# Altium PCB cybathlon_core.PcbDoc
Units mm, origin at the board's own origin, x right, y up, seen from the top; angles counter-clockwise.
Board outline 30 x 40 mm, 4 copper layers (Top Layer, gnd, sig, Bottom Layer), stack 0.603 mm thick; 63 components, 53 nets, 264 pads, 142 vias.
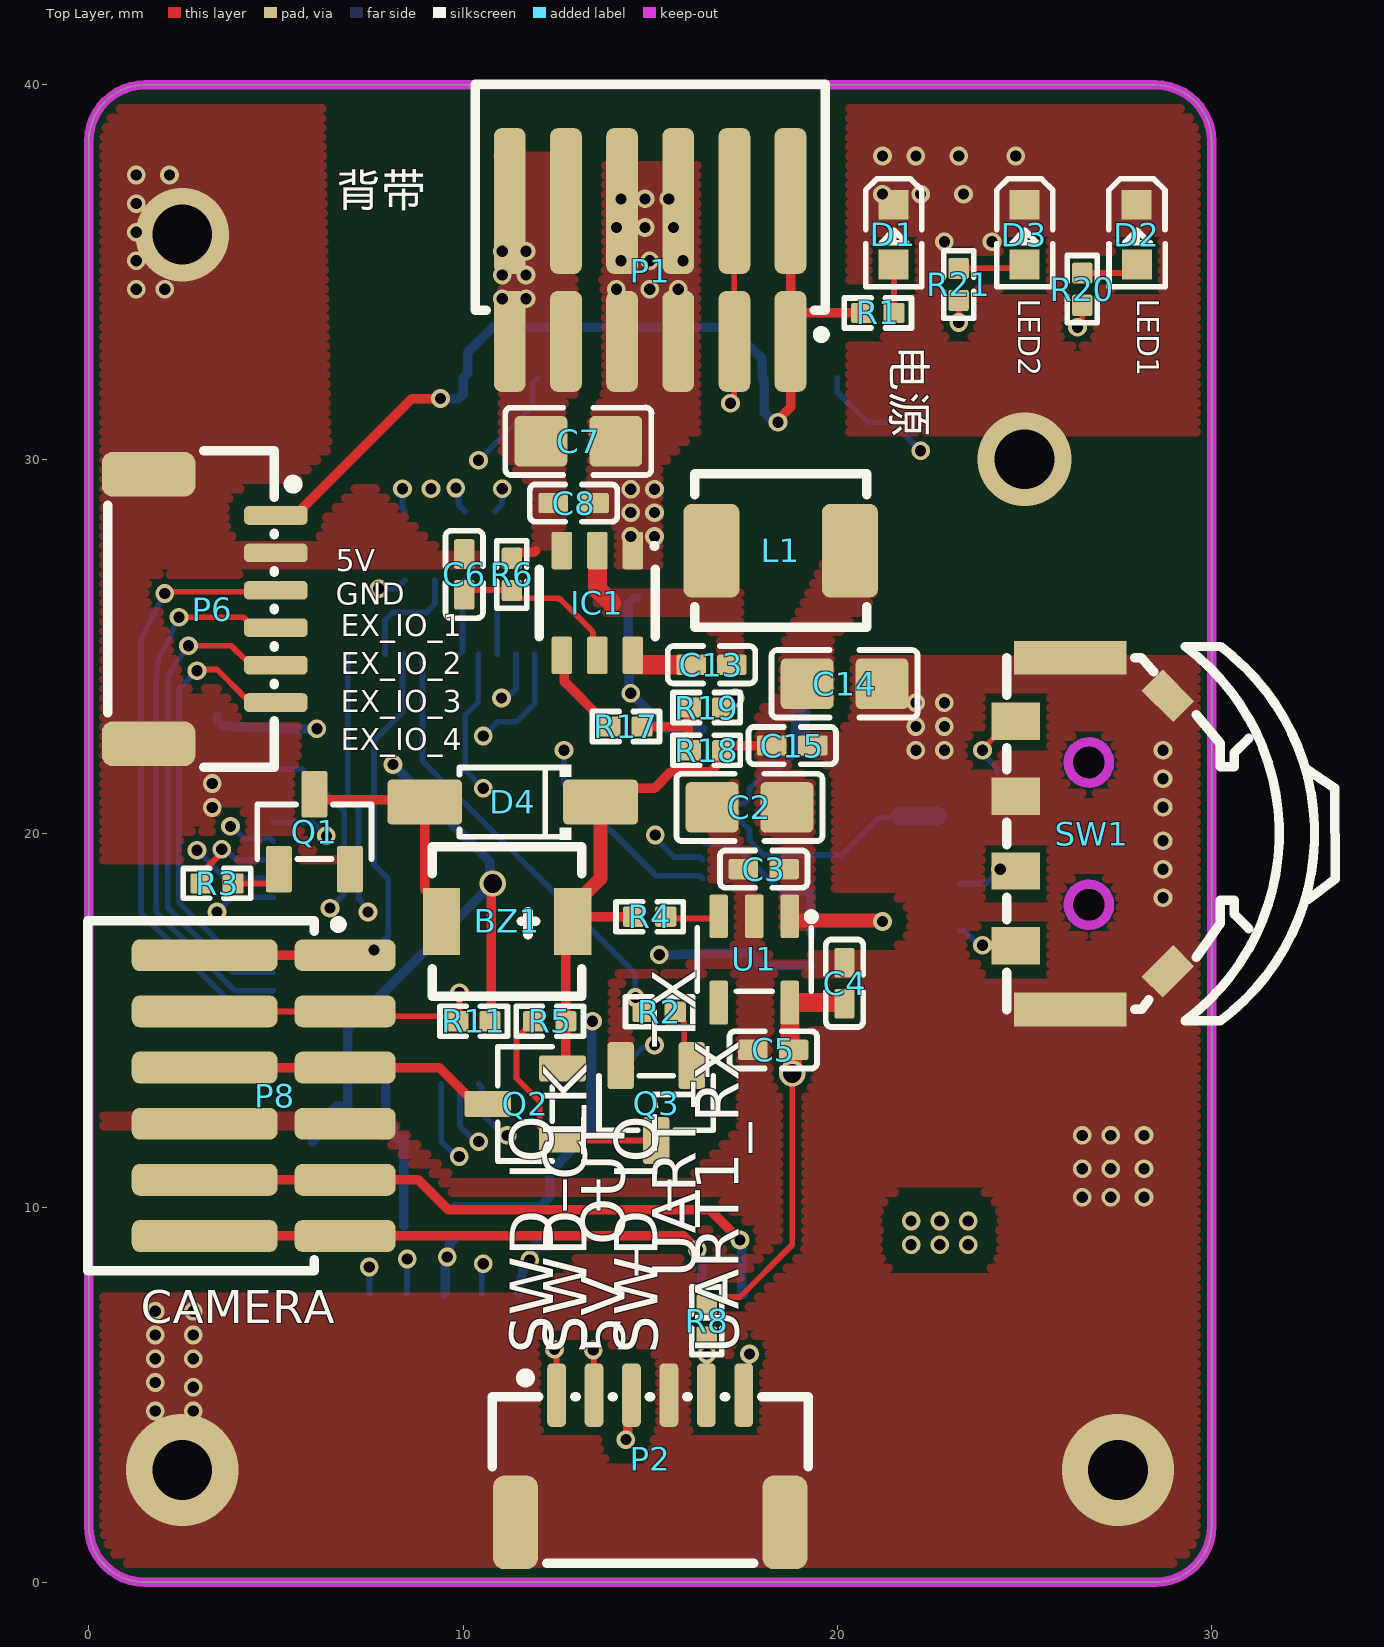
[diagram p0: Top Layer view]
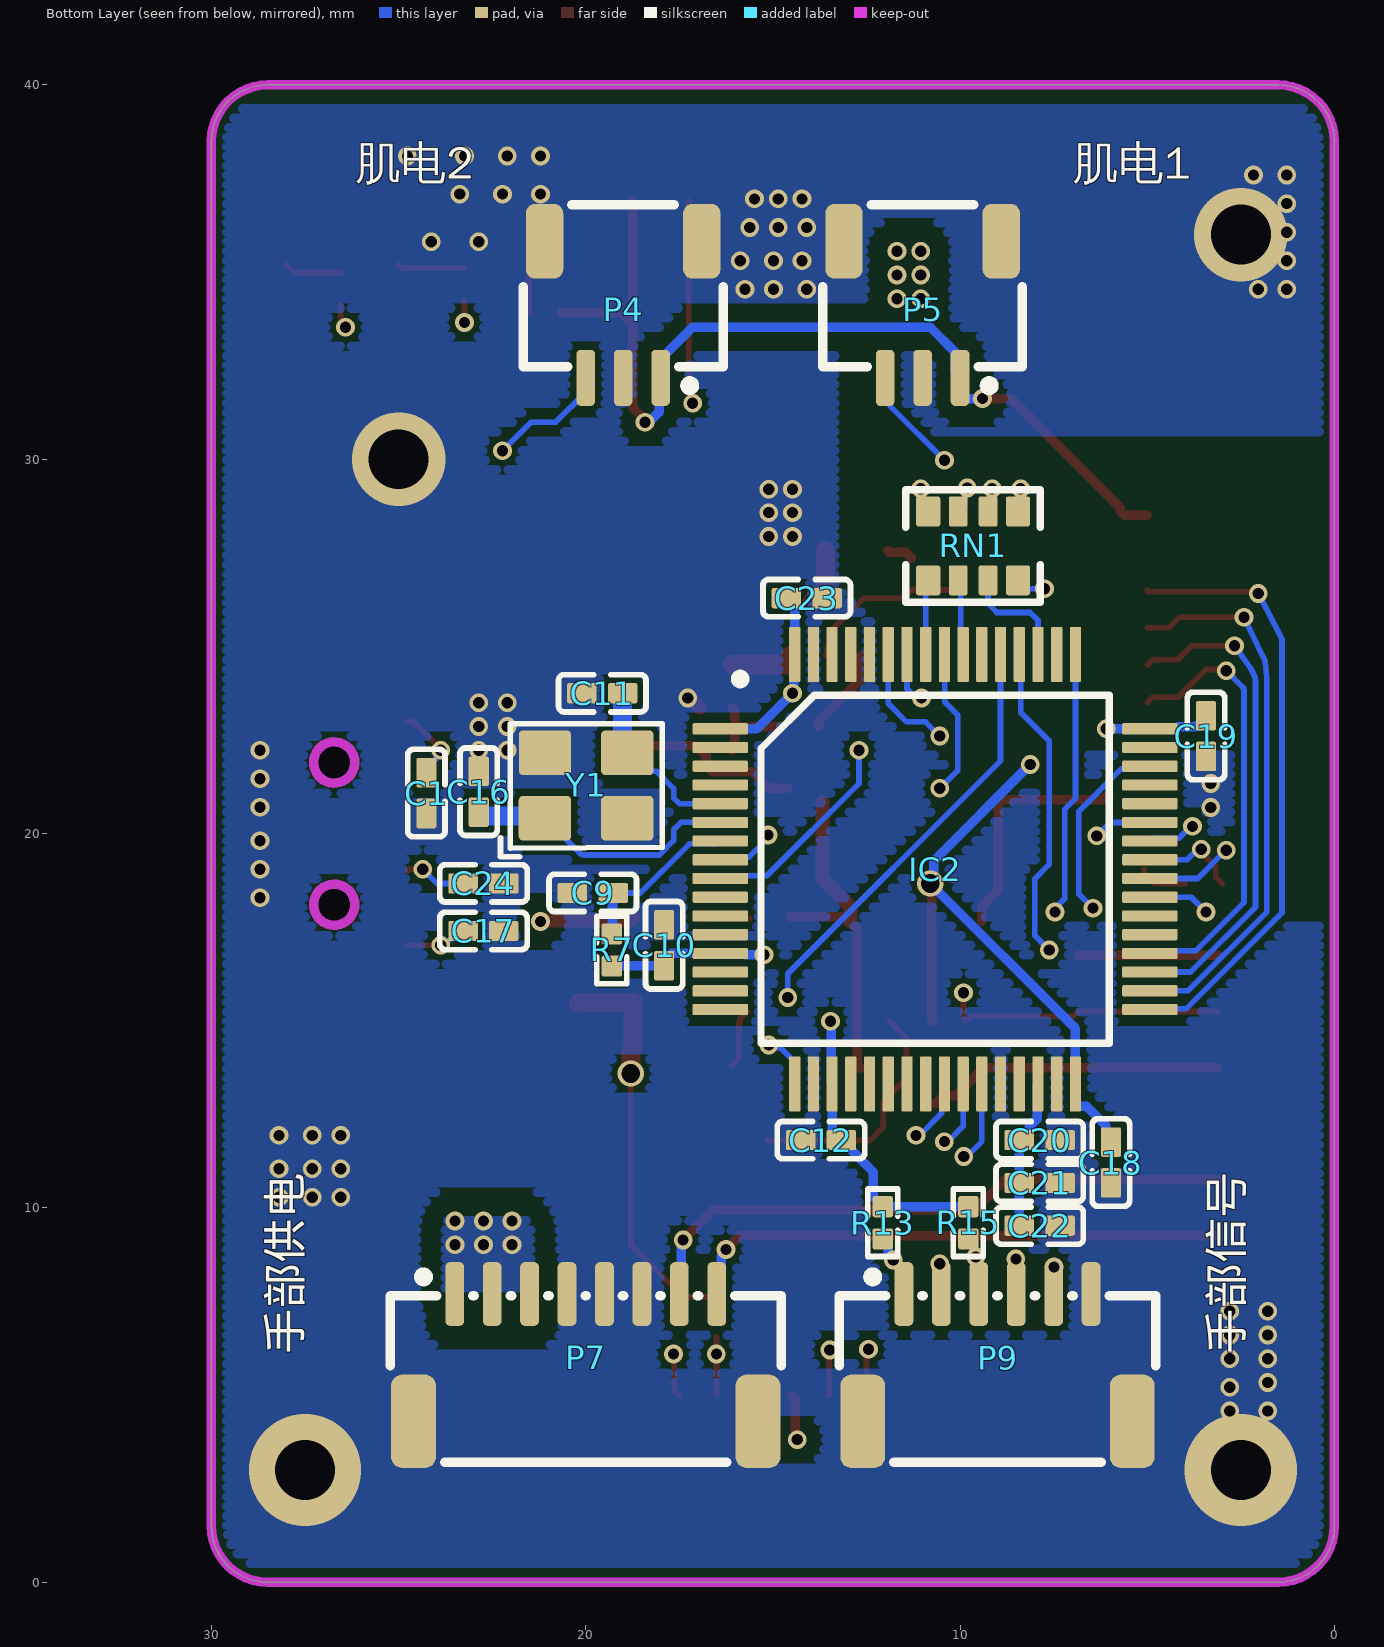
[diagram p1: Bottom Layer view, seen from below]
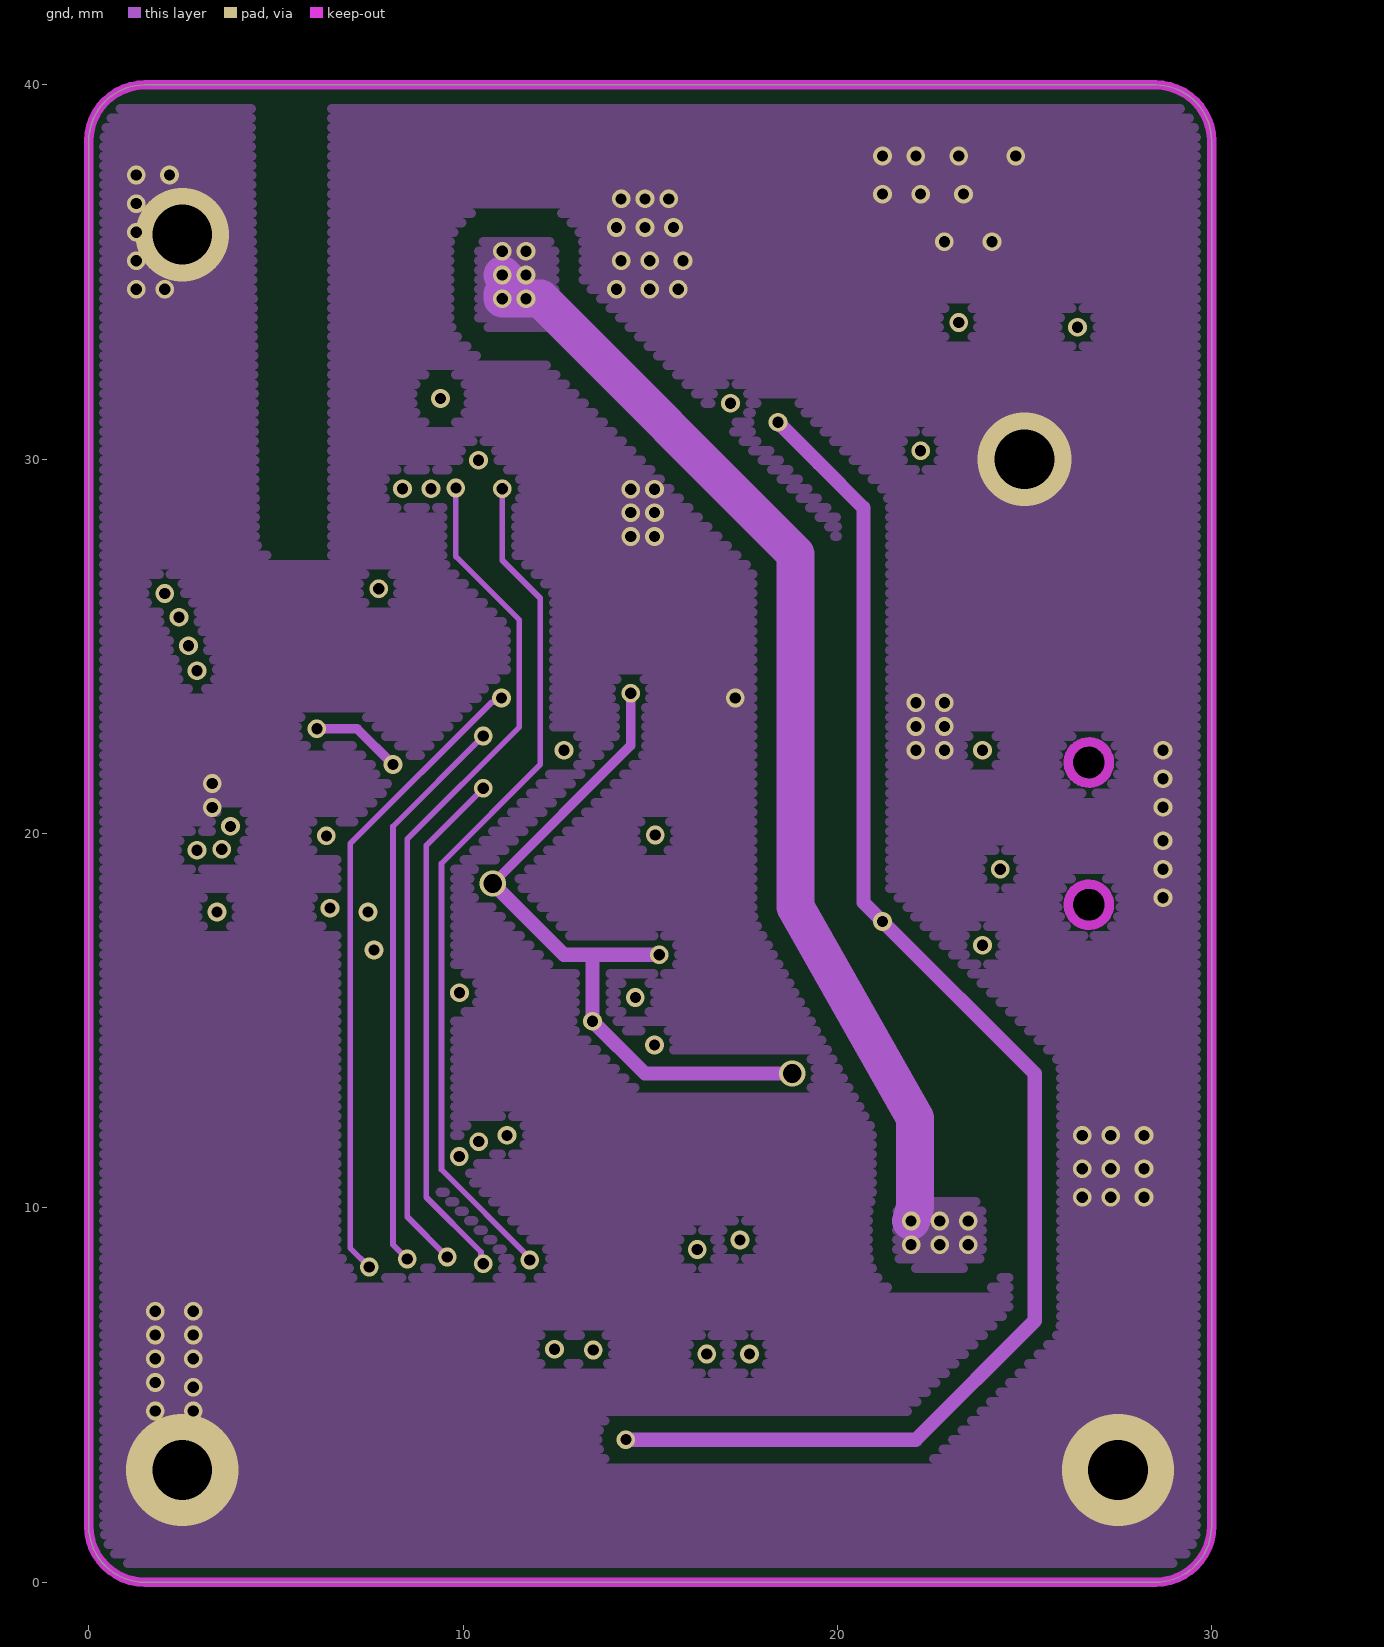
[diagram p2: gnd]
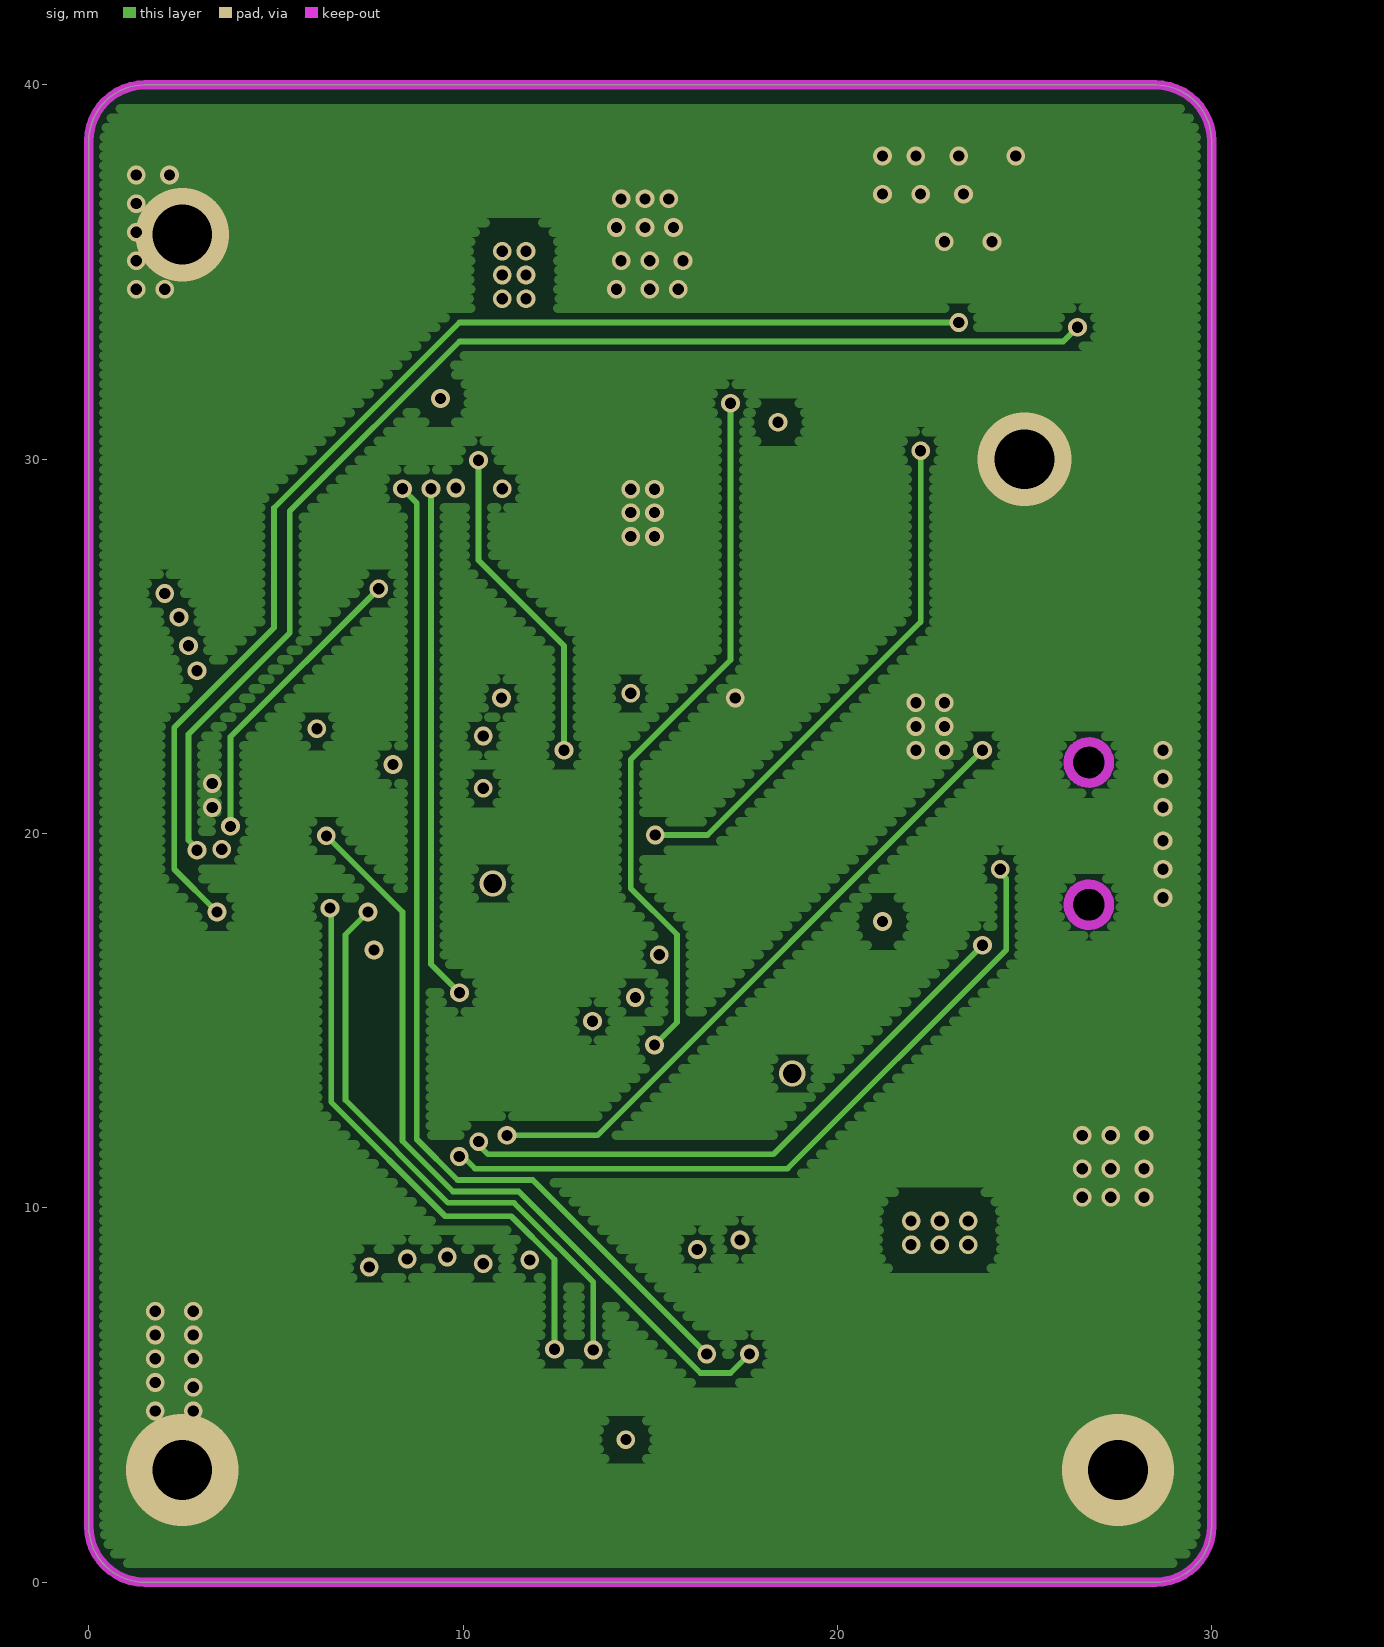
[diagram p3: sig]
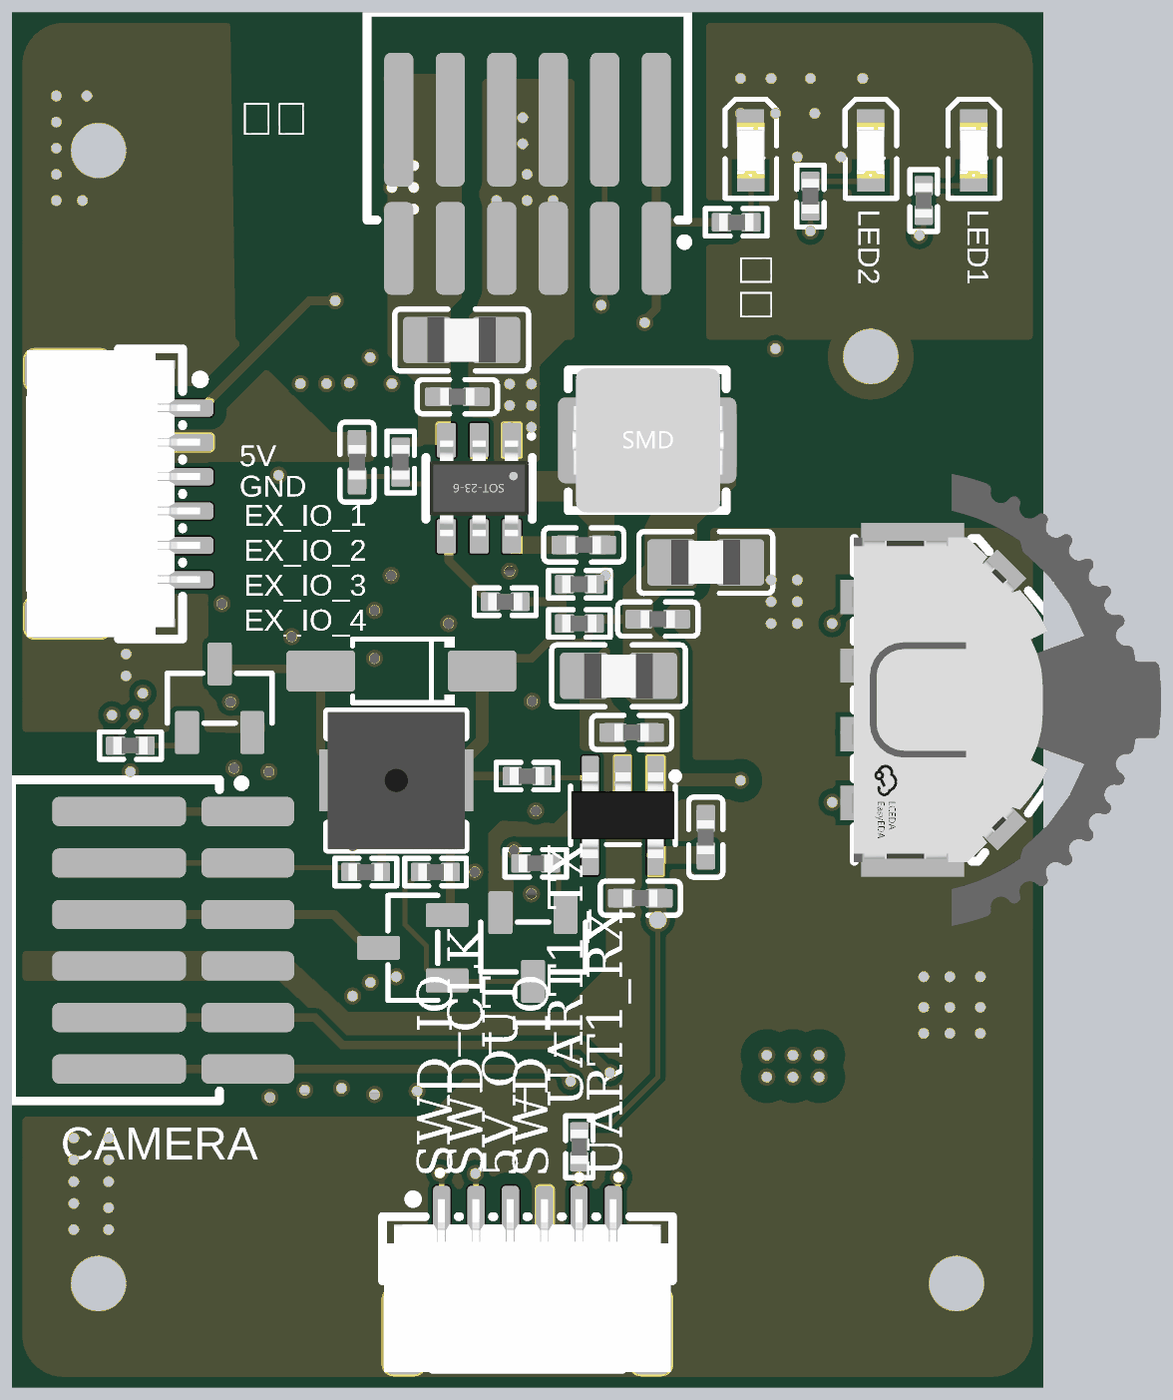
[diagram p4: 3D render of the assembled board from above, using the file's embedded part models]
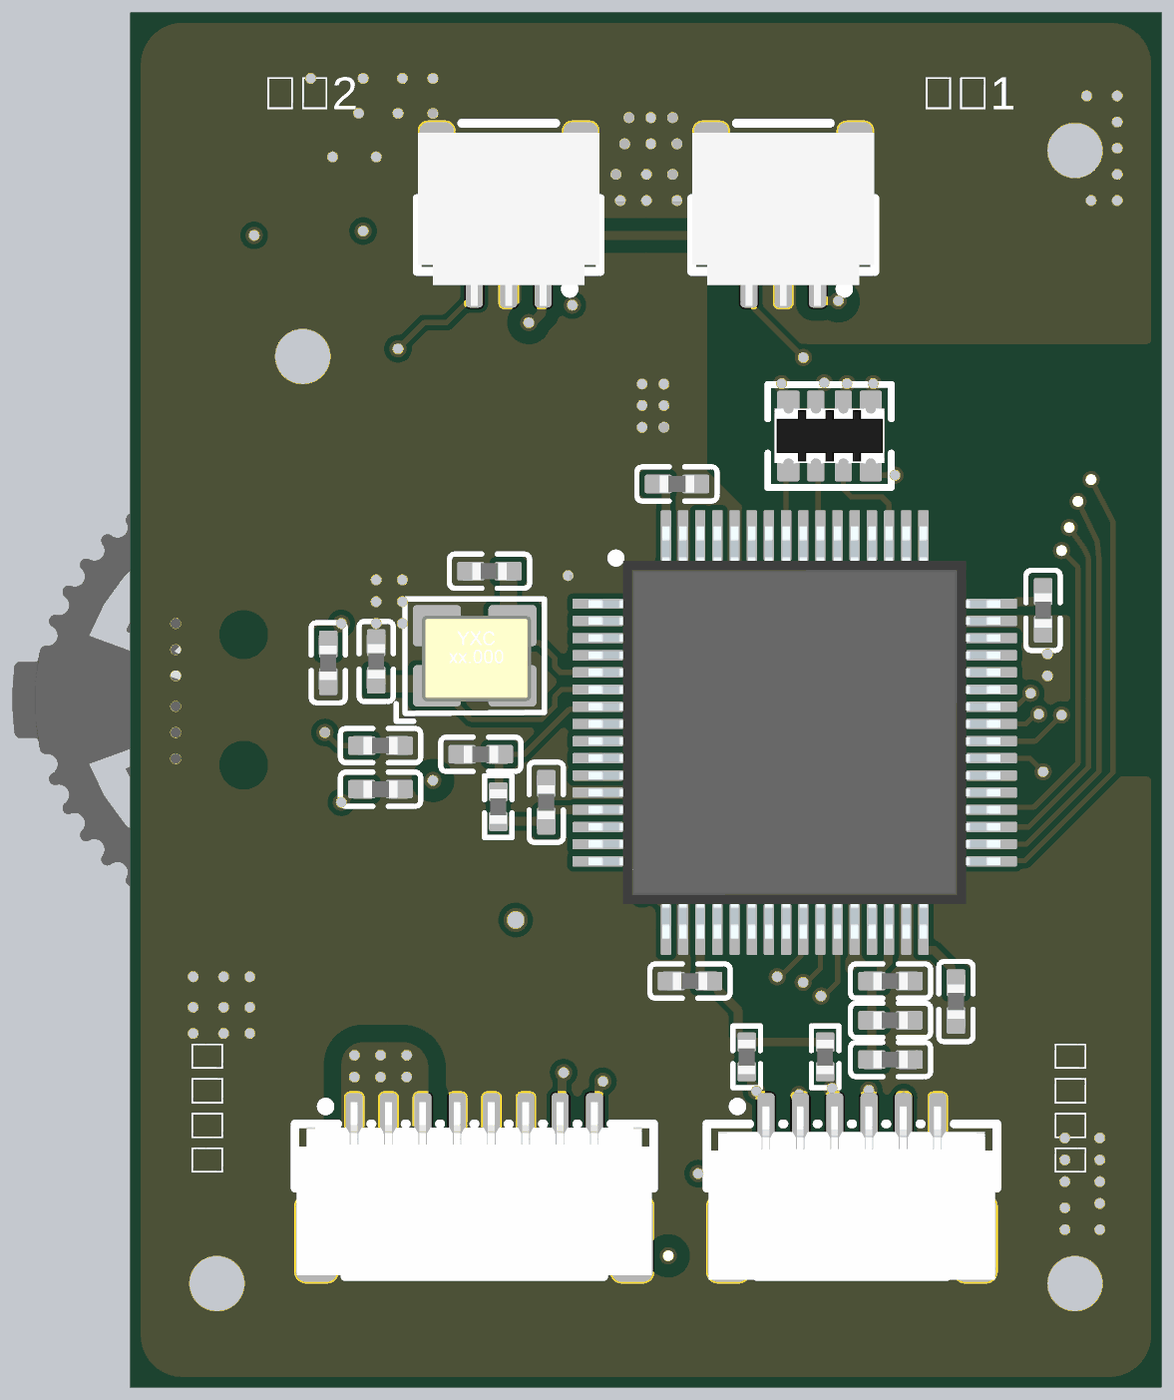
[diagram p5: 3D render of the assembled board from below, using the file's embedded part models]

## Layer stack, top to bottom
Top Solder: solder mask 0.0102, Solder Resist, Dk 3.5
Top Layer: signal copper 0.0356
Dielectric 2: prepreg 0.0711, PP-006, Dk 4.1
gnd: signal copper 0.035
Dielectric 1: dielectric 0.32, FR-4, Dk 4.8
sig: signal copper 0.035
Dielectric 3: prepreg 0.0711, PP-006, Dk 4.1
Bottom Layer: signal copper 0.0356
Bottom Solder: solder mask 0.0102, Solder Resist, Dk 3.5

## Board outline
0,1.5 0,38.5 cw(c1.5,38.5) 1.5,40 28.5,40 cw(c28.5,38.5) 30,38.5 30,1.5 cw(c28.5,1.5) 28.5,0 1.5,0 cw(c1.5,1.5)

## Design rules (kind name [scope] priority, off if disabled: settings)
Clearance 5V [InPolygon vs InNet('5V')] p1: gap=0.381 ignorepadtopadclearanceinfootprint=FALSE
Clearance 12V [InNet('12V') vs InPolygon] p2: gap=0.508 ignorepadtopadclearanceinfootprint=FALSE
Clearance GND [InPolygon vs InNet('GND')] p3: gap=0.254 ignorepadtopadclearanceinfootprint=FALSE
Clearance ALL [All] p4: gap=0.152 ignorepadtopadclearanceinfootprint=FALSE
ComponentClearance [All] p1: gap=0 collisioncheckmode=3 verticalgap=0 showdistances=FALSE
MinimumSolderMaskSliver [All] p1: minsoldermaskwidth=0
PolygonConnect [All] p1: connectstyle=Direct reliefconductorwidth=0.254 reliefentries=4 polygonreliefangle="90 Angle" airgapwidth=0.254
RoutingVias [All] p1: holewidth=0.3 width=0.5 viastyle="Through Hole" minholewidth=0.2 minwidth=0.3 maxholewidth=4 maxwidth=5
SilkToSilkClearance [All] p1: silktosilkclearance=0
SilkToSolderMaskClearance [IsPad] p1: minsilkscreentomaskgap=0 clearancetoexposedcopper=TRUE
SolderMaskExpansion [All] p1: expansion=0 istentingtop=FALSE
Width [All] p1: maxlimit=5 minlimit=0.152 preferedwidth=0.254
26 further rules are at their usual default settings.

## Components (designator, comment, footprint, x,y, rotation, side; value= is the part's Value field where it differs from the comment)
BZ1 "KLJ-4020" BUZ-SMD_L4.0-W4.0-P3.50-L 11.176,17.653 r180 top
C1 "0402B104K500NT" CAP_0402 24.257,21.082 r270 bottom
C2 "CL21A226MAQNNNE" CAP_0805 17.653,20.701 r0 top
C3 "0402X225M250NT" CAP_0402 18.034,19.05 r0 top
C4 "0402B104K500NT" CAP_0402 20.193,16.002 r90 top
C5 "0402X225M250NT" CAP_0402 18.288,14.224 r180 top
C6 "0402B104K500NT" CAP_0402 10.033,26.924 r270 top
C7 "CL21A226MAQNNNE" CAP_0805 13.081,30.48 r180 top
C8 "0402X225M250NT" CAP_0402 12.954,28.829 r180 top
C9 "0402B104K500NT" CAP_0402 19.812,18.415 r180 bottom
C10 "0402B104K500NT" CAP_0402 17.907,17.018 r270 bottom
C11 "0402CG240J500NT" CAP_0402 19.558,23.749 r180 bottom
C12 "0402B104K500NT" CAP_0402 13.716,11.811 r180 bottom
C13 "CL05A105KA5NQNC" CAP_0402 16.637,24.511 r0 top
C14 "CL21A226MAQNNNE" CAP_0805 20.193,24.003 r0 top
C15 "0402X225M250NT" CAP_0402 18.796,22.352 r0 top
C16 "0402CG240J500NT" CAP_0402 22.86,21.119 r90 bottom
C17 "0402B104K500NT" CAP_0402 22.733,17.399 r180 bottom
C18 "0402B104K500NT" CAP_0402 5.969,11.213 r90 bottom
C19 "0402B104K500NT" CAP_0402 3.429,22.606 r90 bottom
C20 "0402B104K500NT" CAP_0402 7.874,11.811 r180 bottom
C21 "0402X225M250NT" CAP_0402 7.874,10.668 r180 bottom
C22 "0402X225M250NT" CAP_0402 7.874,9.525 r180 bottom
C23 "0402B104K500NT" CAP_0402 14.097,26.289 r0 bottom
C24 "0402B104K500NT" CAP_0402 22.733,18.669 r0 bottom
D1 "NCD0402R1" LED0603-RD 21.5,36 r270 top
D2 "SZYY0402B" LED0603-RD 28,36 r270 top
D3 "SZYY0402G" LED0603-RD 25,36 r270 top
D4 "1N5819W" "SHOTTKY DIODE_SOD-123" 11.176,20.955 r180 top
IC1 "MP1470GJ-Z" SOT-23-6_L2.9-W1.6-P0.95-LS2.8-BR 13.589,26.162 r90 top
IC2 "STM32U575RGTx" STM32U575RGTx 10.668,19.05 r180 bottom
L1 "04020-6.8UH-2A" L_04020_L4.1_W4.6 18.487,27.559 r0 top
P1 "背带" CONN-SMD_3P-P1.50_1.5-6P-WTDK 15,36 r180 top
P2 "SWD/UART" CONN-SMD_6P-P1.00_XUNPU_WAFER-SH1.0-6PWB 15,3.3 r0 top
P4 "EMG-1" CONN-SMD_3P-P1.0-HC-1.0-3PWT 19,34 r0 bottom
P5 "EMG-2" CONN-SMD_3P-P1.0-HC-1.0-3PWT 11,34 r0 bottom
P6 "EX_IO" CONN-SMD_6P-P1.00_XUNPU_WAFER-SH1.0-6PWB 3.3,26 r270 top
P7 "手头供电" CONN-SMD_8P-P1.00_XUNPU_WAFER-SH1.0-8PWB 20,6 r180 bottom
P8 "相机" CONN-SMD_3P-P1.50_1.5-6P-WTDK 4,13 r270 top
P9 "手头-SPI" CONN-SMD_6P-P1.00_XUNPU_WAFER-SH1.0-6PWB 9,6 r180 bottom
Q1 "S8050 J3Y(RANGE:200-350)" SOT-23 5.952,20.024 r270 top
Q2 "SI2301-ZE" SOT-23 11.684,12.7 r0 top
Q3 "S8050 J3Y(RANGE:200-350)" SOT-23 15.24,12.827 r90 top
R1 "FRC0402F9090TS" RES_0402 21.082,33.909 r0 top
R2 "0402WGF1002TCE" RES_0402 15.24,15.24 r0 top
R3 "0402WGF4701TCE" RES_0402 3.429,18.669 r180 top
R4 "0402WGF1003TCE" RES_0402 14.986,17.78 r0 top
R5 "0402WGF1003TCE" RES_0402 12.319,14.986 r180 top
R6 "0402WGF1003TCE" RES_0402 11.303,26.924 r90 top
R7 "0402WGF1002TCE" RES_0402 19.304,16.891 r90 bottom
R8 "0402WGF1002TCE" RES_0402 16.51,6.985 r270 top
R11 "0402WGF1002TCE" RES_0402 10.287,14.986 r180 top
R13 "0402WGF1002TCE" RES_0402 12.065,9.603 r270 bottom
R15 "0402WGF1002TCE" RES_0402 9.779,9.603 r270 bottom
R17 "0402WGF7502TCE" RES_0402 14.351,22.86 r0 top
R18 "0402WGF4022TCE" RES_0402 16.51,22.225 r0 top
R19 "0402WGF7681TCE" RES_0402 16.51,23.368 r0 top
R20 "FRC0402F9090TS" RES_0402 26.543,34.544 r90 top
R21 "FRC0402F9090TS" RES_0402 23.241,34.671 r90 top
RN1 "4D02WGJ0331TCE" RES_0603_4P 9.652,27.686 r0 bottom
SW1 "TM-2024A" SW-SMD_TM-2024A 26.8,20 r270 top
U1 "ICW1214C33M5GQ1" SOT-23-5_L3.0-W1.7-P0.95-LS2.8-BL 17.78,16.637 r180 top
Y1 "TAXM16M4RLBCCT2T" OSC_3225 19.939,21.209 r180 bottom

## Footprints (in the part's own frame and the unit in brackets; to place one, negate y for a bottom-side part, rotate by r counter-clockwise, add the part's x,y. Pads: shape width x height; smd on the part's side, far side on the other; paste and mask are expansions set on the pad)
BUZ-SMD_L4.0-W4.0-P3.50-L [mm]
  rect 1x1.8 smd: 1(-1.75,0) 2(1.75,0)
  silkscreen extent -2,-2 2,2, body extent -2,-2 2,2.01, height 2.01
CAP_0402 [mm]
  rrect20% 0.79x0.54 smd: 1(-0.545,0) 2(0.545,0)
  silkscreen extent -1.17,-0.5 1.17,0.5, body extent -0.5,-0.25 0.5,0.25, height 0.25
CAP_0805 [mm]
  rrect20% 1.41x1.35 smd: 1(-1,0) 2(1,0)
  silkscreen extent -1.95,-0.9 1.95,0.9, body extent -1,-0.65 1,0.65, height 0.73
CONN-SMD_3P-P1.0-HC-1.0-3PWT [mm]
  rrect50% 0.5x1.5 smd paste+0 mask+0.05: 1(-1,1.825) 2(0,1.825) 3(1,1.825)
  rrect50% 1x2 smd paste+0 mask+0.05: 4(-2.1,-1.825) 5(2.1,-1.825)
  silkscreen extent -2.67,-2.79 2.67,2.16, body extent -2.65,-2.52 2.65,2.52, height 3.14
CONN-SMD_3P-P1.50_1.5-6P-WTDK [mm]
  rrect50% 0.85x3.9 smd: 1(-3.75,-0.9) 2(-2.25,-0.9) 3(-0.75,-0.9) 4(0.75,-0.9) 5(2.25,-0.9) 6(3.75,-0.9)
  rrect50% 0.85x2.7 smd: 1(-3.75,2.85) 2(-2.25,2.85) 3(-0.75,2.85) 4(0.75,2.85) 5(2.25,2.85) 6(3.75,2.85)
  silkscreen extent -4.67,-4.03 4.67,2.77
CONN-SMD_6P-P1.00_XUNPU_WAFER-SH1.0-6PWB [mm]
  rrect50% 0.5x1.7 smd mask+0.05: 1(-2.5,1.7) 2(-1.5,1.7) 3(-0.5,1.7) 4(0.5,1.7) 5(1.5,1.7) 6(2.5,1.7)
  rrect50% 1.2x2.5 smd mask+0.05: 7(3.6,-1.7) 8(-3.6,-1.7)
  silkscreen extent -4.22,-2.79 4.22,2.29, body extent -4.18,-2.88 4.17,2.17, height 3.14
CONN-SMD_8P-P1.00_XUNPU_WAFER-SH1.0-8PWB [mm]
  rrect50% 0.5x1.7 smd paste+0 mask+0.05: 1(-3.5,1.7) 2(-2.5,1.7) 3(-1.5,1.7) 4(-0.5,1.7) 5(0.5,1.7) 6(1.5,1.7) 7(2.5,1.7) 8(3.5,1.7)
  rrect50% 1.2x2.5 smd paste+0 mask+0.05: 9(4.6,-1.7) 10(-4.6,-1.7)
  silkscreen extent -5.22,-2.79 5.22,2.29, body extent -5.18,-2.76 5.17,2.29, height 3.14
L_04020_L4.1_W4.6 [mm]
  rrect30% 1.5x2.5 smd: 1(-1.85,0)
  rrect30% 1.5x2.5 smd paste+0: 2(1.85,0)
  silkscreen extent -2.3,-2.05 2.3,2.05, body extent -2.17,-2.1 2.23,2.1, height 2.1
LED0603-RD [mm]
  rect 0.8x0.8 smd: 1(0.8,0.003) 2(-0.8,-0.003)
  silkscreen extent -1.49,-0.75 1.39,0.76, body extent -0.81,-0.4 0.81,0.4, height 0.61
OSC_3225 [mm]
  rrect20% 1.4x1.2 smd: 1(-1.151,-0.799) 2(1.049,-0.799) 3(1.049,0.951) 4(-1.151,0.951)
  silkscreen extent -2.34,-1.83 1.98,1.73, body extent -1.59,-1.25 1.59,1.25, height 0.69
RES_0402 [mm]
  rrect20% 0.566x0.54 smd: 1(-0.43,0) 2(0.43,0)
  silkscreen extent -0.9,-0.4 0.9,0.4, body extent -0.5,-0.25 0.5,0.25, height 0.25
RES_0603_4P [mm]
  rrect20% 0.65x0.8 smd: 1(-1.2,-0.92) 4(1.2,-0.92) 5(1.2,0.92) 8(-1.2,0.92)
  rrect20% 0.5x0.8 smd: 2(-0.4,-0.92) 3(0.4,-0.92) 6(0.4,0.92) 7(-0.4,0.92)
  silkscreen extent -1.8,-1.5 1.8,1.5, body extent -1.6,-0.8 1.6,0.8, height 0.55
"SHOTTKY DIODE_SOD-123" [mm]
  rrect20% 2x1.2 smd: 1(-2.5,0.113) 2(2.2,0.113)
  silkscreen extent -1.71,-0.89 1.27,1.12
SOT-23 [mm]
  rrect20% 1.25x0.7 smd: 1(0.974,-0.872) 2(0.974,1.028) 3(-1.026,0.078)
  silkscreen extent -0.75,-1.45 0.7,1.6
SOT-23-5_L3.0-W1.7-P0.95-LS2.8-BL [mm]
  rrect20% 0.49x1.157 smd paste+0 mask+0.051: 1(-0.95,-1.154) 2(0,-1.154) 3(0.95,-1.154)
  rrect20% 0.49x1.175 smd paste+0 mask+0.051: 4(0.95,1.154) 5(-0.95,1.154)
  silkscreen extent -1.62,-1.24 1.53,0.85, body extent -1.5,-1.25 1.5,1.25, height 1.15
SOT-23-6_L2.9-W1.6-P0.95-LS2.8-BR [mm]
  rrect20% 1x0.55 smd paste+0 mask+0.051: 1(1.4,-0.95) 2(1.4,0) 3(1.4,0.95) 4(-1.4,0.95) 5(-1.4,0) 6(-1.4,-0.95)
  silkscreen extent -0.9,-1.55 1.53,1.55, body extent -1.4,-1.44 1.4,1.44, height 1.64
STM32U575RGTx [mm] "LQFP64"
  rrect20% 1.475x0.3 smd: 1(-5.738,3.75) 2(-5.738,3.25) 3(-5.738,2.75) 4(-5.738,2.25) 5(-5.738,1.75) 6(-5.738,1.25) 7(-5.738,0.75) 8(-5.738,0.25) 9(-5.738,-0.25) 10(-5.738,-0.75) 11(-5.738,-1.25) 12(-5.738,-1.75) 13(-5.738,-2.25) 14(-5.738,-2.75) 15(-5.738,-3.25) 16(-5.738,-3.75) 33(5.738,-3.75) 34(5.738,-3.25) 35(5.738,-2.75) 36(5.738,-2.25) 37(5.738,-1.75) 38(5.738,-1.25) 39(5.738,-0.75) 40(5.738,-0.25) 41(5.738,0.25) 42(5.738,0.75) 43(5.738,1.25) 44(5.738,1.75) 45(5.738,2.25) 46(5.738,2.75) 47(5.738,3.25) 48(5.738,3.75)
  rrect20% 0.3x1.475 smd: 17(-3.75,-5.738) 18(-3.25,-5.738) 19(-2.75,-5.738) 20(-2.25,-5.738) 21(-1.75,-5.738) 22(-1.25,-5.738) 23(-0.75,-5.738) 24(-0.25,-5.738) 25(0.25,-5.738) 26(0.75,-5.738) 27(1.25,-5.738) 28(1.75,-5.738) 29(2.25,-5.738) 30(2.75,-5.738) 31(3.25,-5.738) 32(3.75,-5.738) 49(3.75,5.738) 50(3.25,5.738) 51(2.75,5.738) 52(2.25,5.738) 53(1.75,5.738) 54(1.25,5.738) 55(0.75,5.738) 56(0.25,5.738) 57(-0.25,5.738) 58(-0.75,5.738) 59(-1.25,5.738) 60(-1.75,5.738) 61(-2.25,5.738) 62(-2.75,5.738) 63(-3.25,5.738) 64(-3.75,5.738)
  silkscreen extent -5.33,-4.65 4.65,5.2, body extent -6,-6 6,6, height 1.6
SW-SMD_TM-2024A [mm]
  rect 1x1.3 smd: 1(-3,-2.03) 2(3,-2.03) 3(-1,-2.03) 4(1,-2.03)
  rect 0.9x3 smd: 5(-4.7,-0.58) 6(4.7,-0.58)
  rect 1.2x0.8 smd rot 45: 7(-3.68,2.03)
  rect 1.2x0.8 smd rot 135: 8(3.68,2.03)
  Keep-Out Layer board cut-out: -1.35,-0.08 -1.405,0.158 -1.557,0.35 -1.778,0.456 -2.023,0.456 -2.243,0.35 -2.396,0.158 -2.45,-0.08 -2.45,-0.08 -2.377,-0.355 -2.175,-0.557 -1.9,-0.63 -1.625,-0.557 -1.424,-0.355 -1.35,-0.08
  Keep-Out Layer board cut-out: 2.45,-0.08 2.395,0.158 2.243,0.35 2.022,0.456 1.777,0.456 1.557,0.35 1.404,0.158 1.35,-0.08 1.35,-0.08 1.423,-0.355 1.625,-0.557 1.9,-0.63 2.175,-0.557 2.376,-0.355 2.45,-0.08
  Multi-Layer keep-out circle w0.254: c-1.9,-0.08 r0.55
  Multi-Layer keep-out circle w0.254: c1.9,-0.08 r0.55
  silkscreen extent -5,-2.28 5,6.5, body extent -6.58,-2.34 6.58,6.65, height 2.2

## Part data
BZ1: library part BUZZER_UNSOURCE
C1 C2 C3 C4 C5 C6 C7 C8 C9 C10 C11 C12 C13 C14 C15 C16 C17 C18 C19 C20 C21 C22 C23 C24: library part CAP
D1 D2 D3: library part LED
D4: library part "SHOTTKY DIODE"
IC2: "STM32U575RGT6"
L1: library part INDUCTANCE
P1 P2 P6 P8 P9: library part 6P
P4 P5: library part 3P
P7: library part 8P
Q1 Q3: library part NPN
Q2: library part PMOS
R1 R2 R3 R4 R5 R6 R7 R8 R11 R13 R15 R17 R18 R19 R20 R21: library part RES
RN1: library part RES_4P
SW1: library part WHEEL_SWITCH
U1: library part SGM2210
Y1: library part OSC

## Via types
v1: diameter 0.5, hole 0.3, Top Layer to Bottom Layer, tented both sides, 136 vias
v2: diameter 0.7, hole 0.5, Top Layer to Bottom Layer, tented both sides, 2 vias
v3: diameter 3, hole 1.6, Top Layer to Bottom Layer, 2 vias
v4: diameter 2.5, hole 1.6, Top Layer to Bottom Layer, 2 vias

## Nets (pads, with @x,y where several pads share a name; then routed paths per layer and width w, separated by ;. In a path a pad name is that pad's centre, name@x,y a point inside that pad or via, vN(x,y) a via of type N, cw(c..) or ccw(c..) an arc to the next point about the centre after c; other vN are vias at no path point)
3V3: C4.1 C5.1 C10.2 C12.2 C18.2 C19.2 C23.2 IC2.1 IC2.13 IC2.19 IC2.32 IC2.48 IC2.64 R7.1 R8.1 R11.1 R13.1 R15.1 U1.5 | length 70
  Top Layer w0.152: R8.1 16.51,7.426 16.704,7.62 17.399,7.62 18.796,9.017 v2(18.796,13.589)
  Top Layer w0.254: R11.1 10.756,15.025 10.756,18.63 v2(10.795,18.669)
  Top Layer w0.508: C5.1@18.739,14.24 18.739,15.474 U1.5 20.177,15.483 20.193,15.467 C4.1 ; v2(18.796,13.589) C5.1@18.796,14.208
  gnd w0.254: v1(6.096,22.8) 7.172,22.8 v1(8.128,21.844) ; v2(10.795,18.669) 14.478,22.352 v1(14.478,23.749)
  gnd w0.381: v2(10.795,18.669) 12.7,16.764 13.462,16.764 ; v1@15.211,16.764 13.462,16.764 ; v2(18.796,13.589) 14.859,13.589 v1(13.462,14.986) 13.462,16.764
  Bottom Layer w0.254: C19.2 3.429,23.026 3.572,22.883 3.698,22.883 3.721,22.86 4.18,22.86 4.217,22.823 4.907,22.823 IC2.48 v1(6.096,22.8) ; C18.2 6.112,11.901 6.112,12.208 6.617,12.713 6.895,12.713 6.918,12.736 IC2.32 6.918,14.792 v2(10.795,18.669) 10.71,18.754 10.71,19.262 v1(8.128,21.844) ; R15.1 R13.1 12.065,10.046 12.319,10.3 12.319,10.959 12.903,11.543 12.903,11.668 13.046,11.811 13.275,11.811 13.418,11.954 IC2.19 13.44,13.334 13.44,14.964 v1(13.462,14.986) ; C23.2 14.561,26.289 14.418,26.146 IC2.64 14.441,24.765 14.441,23.786 v1(14.478,23.749) 15.427,22.8 IC2.1 ; v1(15.24,16.764) 15.736,16.764 15.749,16.777 16.383,16.777 IC2.13 17.705,16.8 17.907,16.598 C10.2 17.913,16.467 19.298,16.467 R7.1
5V: BZ1.1 C2.2 C3.2 C14.1 C15.1 D4.1 L1.2 P1.1 P2.3 P4.1 P5.1 P6.1 Q2.2 R1.1 R4.1 R5.1 R18.2 U1.1 | length 82.4
  Top Layer w0.254: P6.1 5.6,28.5 5.723,28.623 5.723,28.71 8.636,31.623 v1(9.398,31.623) ; Q2.2 12.749,13.82 12.749,17.476 BZ1.1 13.053,17.78 R4.1 ; v1(14.351,3.81) 14.398,3.857 14.398,4.898 P2.3 ; D4.1@14.605,21.209 15.113,21.209 15.559,21.655 16.615,21.655 16.784,21.824 16.784,22.082 16.927,22.225 R18.2 17.067,22.352 C15.1 ; v1(18.415,30.988) 18.415,31.055 18.75,31.39 18.75,33.15 P1.1@18.75,33.618 ; P1.1@18.75,36.9 P1.1@18.75,33.618 ; R1.1 19.041,33.909 P1.1@18.75,33.618
  Top Layer w0.381: BZ1.1 12.926,18.053 13.676,18.803 D4.1 ; U1.1 18.73,17.73 18.784,17.676 21.186,17.676 v1(21.209,17.653)
  gnd w0.381: v1(14.351,3.81) 22.098,3.81 25.273,6.985 25.273,13.589 v1(21.209,17.653) 20.701,18.161 20.701,28.702 19.506,29.897 v1(18.415,30.988)
  Bottom Layer w0.254: v1(9.398,31.623) 9.877,31.623 10,31.746 P5.1 10.123,32.298 10.123,32.856 10.795,33.528 17.145,33.528 17.875,32.798 17.877,32.798 18,32.675 P4.1 18.042,32.133 18.042,31.26 18.267,31.035 18.368,31.035 v1(18.415,30.988)
12V: C7.2 C8.2 IC1.3 P1.5 P1.6 P7.1 P7.2 P7.3 R6.2 | length 30.6
  Top Layer w0.254: R6.2 11.303,27.367 11.446,27.51 11.886,27.51 11.938,27.562
  gnd w1.016: v1@11.049,34.417 v1(11.049,34.29) 12.065,34.29 18.883,27.472 18.883,18.309 18.883,18.041 22.077,12.399 22.077,10.033 v1(21.971,9.652) ; v1(11.049,34.925) 11.367,34.608
  other v1: 21.971,9.017 22.733,9.017 23.495,9.017 22.733,9.652 23.495,9.652 11.684,34.29 11.684,34.925 11.049,35.56 11.684,35.56
BZ_PWM: IC2.41 R3.2 | length 2.6
  Top Layer w0.152: R3.2 3.166,18.836 3.166,19.1 3.556,19.49 v1(3.556,19.584)
  Bottom Layer w0.152: v1(3.556,19.584) 3.65,19.584 3.934,19.3 IC2.41
CAMERA_PWR_CTL: IC2.53 R2.1 | length 11.5
  Bottom Layer w0.152: IC2.53 8.918,21.943 14.605,16.256 v1(14.605,15.621)
CAMERA_VCC: P8.3 Q2.3 | length 8
  Top Layer w0.254: P8.3@3.1,13.75 6.85,13.75 9.364,13.75 10.113,13.001 10.435,13.001 Q2.3
DCDC_BST: C13.1 IC1.6 | length 1.8
  Top Layer w0.508: IC1.6 14.539,24.537 14.565,24.511 C13.1
DCDC_FB: IC1.4 R17.1 | length 2.4
  Top Layer w0.254: IC1.4 12.709,24.692 12.709,24.059 13.765,23.003 13.765,22.877 R17.1@13.783,22.86
DCDC_SW: C13.2 IC1.2 L1.1 | length 1.6
  Top Layer w0.508: IC1.2 13.589,26.543 13.97,26.162
EMG_1: IC2.8 P4.3 | length 18.9
  sig w0.152: v1(15.134,19.96) 16.531,19.96 22.225,25.654 v1(22.225,30.226)
  Bottom Layer w0.152: v1(15.134,19.96) 15.134,19.879 15.639,19.374 16.332,19.374 IC2.8 ; P4.3 20,31.793 20.805,30.988 21.463,30.988 v1(22.225,30.226)
EMG_2: IC2.9 P5.3 | length 17.2
  sig w0.152: v1(10.414,29.972) 10.414,27.305 12.7,25.019 v1(12.7,22.225)
  Bottom Layer w0.152: v1(10.414,29.972) 11.856,31.414 11.856,32.031 P5.3 ; v1(12.7,22.225) 12.7,21.336 15.162,18.874 16.332,18.874 IC2.9
EX_IO_1: IC2.36 P6.6 | length 12
  Top Layer w0.152: v1(2.892,24.349) 2.927,24.384 3.429,24.384 4.169,23.644 4.853,23.644 cw(c4.853,23.491) 4.856,23.644 P6.6
  Bottom Layer w0.152: v1(2.892,24.349) 2.886,24.349 2.458,23.921 ccw(c2.565,23.813) 2.413,23.813 2.413,18.161 3.7,16.874 4.856,16.874 IC2.36
EX_IO_2: IC2.35 P6.5 | length 13.2
  Top Layer w0.152: v1(2.667,25.019) 3.81,25.019 4.185,24.644 4.856,24.644 P6.5
  Bottom Layer w0.152: v1(2.667,25.019) 2.245,24.425 ccw(c2.369,24.336) 2.233,24.405 2.141,24.221 ccw(c2.413,24.084) 2.108,24.084 2.108,18.035 3.843,16.3 IC2.35
EX_IO_3: IC2.34 P6.4 | length 14.7
  Top Layer w0.152: v1(2.413,25.781) 4.137,25.781 4.418,25.5 P6.4
  Bottom Layer w0.152: 1.85,24.584 1.809,24.167 1.803,24.14 1.803,17.909 3.912,15.8 IC2.34 ; 1.85,24.584 cw(c2.001,24.569) 1.857,24.617 cw(c2.001,24.569) 1.864,24.635 v1(2.413,25.781)
EX_IO_4: IC2.33 P6.3 | length 16.3
  Top Layer w0.152: v1(2.032,26.416) 2.074,26.458 4.958,26.458 P6.3
  Bottom Layer w0.152: v1(2.032,26.416) 1.397,25.195 1.397,17.884 3.964,15.317 4.913,15.317 IC2.33
GND: C1.2 C2.1 C3.1 C4.2 C5.2 C6.1 C7.1 C8.1 C9.1 C10.1 C11.1 C12.1 C14.2 C15.2 C16.2 C17.2 C18.1 C19.1 C20.2 C21.2 C22.2 C23.1 C24.1 D1.2 D2.2 D3.2 IC1.1 IC2.12 IC2.18 IC2.28 IC2.31 IC2.47 IC2.60 IC2.63 P1.3 P1.4 P2.4 P2.7 P2.8 P4.2 P4.4 P4.5 P5.2 P5.4 P5.5 P6.2 P6.7 P6.8 P7.4 P7.5 P7.6 P7.9 P7.10 P8.4 P9.6 P9.7 P9.8 Q1.2 Q3.2 R19.2 SW1.3 SW1.5 SW1.6 SW1.7 SW1.8 U1.2 Y1.2 Y1.4 | length 0.4
  Top Layer w0.381: R19.2@16.953,23.368 17.184,23.599 17.249,23.599 v1(17.272,23.622)
  other v1: 1.778,4.572 2.794,4.572 2.794,5.207 1.778,5.334 1.778,5.969 2.794,5.969 1.778,6.604 2.794,6.604 1.778,7.239 2.794,7.239 26.543,10.287 27.305,10.287 28.194,10.287 26.543,11.049 27.305,11.049 28.194,11.049 26.543,11.938 27.305,11.938 28.194,11.938 28.702,18.288 28.702,19.05 28.702,19.812 3.302,20.7 28.702,20.701 3.302,21.336 28.702,21.463 22.098,22.225 22.86,22.225 28.702,22.225 22.098,22.86 22.86,22.86 22.098,23.495 22.86,23.495 14.478,27.94 15.113,27.94 14.478,28.575 15.113,28.575 14.478,29.2 15.113,29.2 1.27,34.544 2.032,34.544 14.097,34.544 14.986,34.544 15.748,34.544 1.27,35.306 14.224,35.306 14.986,35.306 15.875,35.306 22.86,35.814 24.13,35.814 1.27,36.068 14.097,36.195 14.859,36.195 15.621,36.195 1.27,36.83 14.224,36.957 14.859,36.957 15.494,36.957 21.209,37.084 22.225,37.084 23.368,37.084 1.27,37.592 2.159,37.592 21.209,38.1 22.098,38.1 23.241,38.1 24.765,38.1
  other v3: 2.5,3 27.5,3
  other v4: 25,30 2.5,36
KEY1: C1.1 IC2.25 SW1.1 | length 20.7
  Top Layer w0.152: v1(23.876,22.225) 23.876,22.256 24.62,23 SW1.1
  sig w0.152: v1(11.176,11.938) 13.589,11.938 v1(23.876,22.225)
  Bottom Layer w0.152: IC2.25 10.492,13.238 10.492,12.528 11.082,11.938 v1(11.176,11.938) ; v1(23.876,22.225) 23.876,22.133 24.257,21.752 C1.1
KEY2: C17.1 IC2.26 SW1.2 | length 19.4
  Top Layer w0.152: v1(23.876,17.018) 24.752,17.018 SW1.2
  sig w0.152: v1(10.42,11.772) 10.42,11.677 10.667,11.43 18.288,11.43 v1(23.876,17.018)
  Bottom Layer w0.152: IC2.26 9.918,12.18 10.326,11.772 v1(10.42,11.772) ; C17.1 23.403,17.399 23.784,17.018 v1(23.876,17.018)
KEY3: C24.2 IC2.27 SW1.4 | length 23.2
  Top Layer w0.152: v1(24.355,19.05) 24.72,19.05 SW1.4
  sig w0.152: v1(9.902,11.374) 9.996,11.374 10.321,11.049 18.669,11.049 24.511,16.891 24.511,18.8 24.355,18.956 v1(24.355,19.05)
  Bottom Layer w0.152: IC2.27 9.418,11.777 9.821,11.374 v1(9.902,11.374) ; C24.2 23.974,18.669 v1(24.355,19.05)
LED1: IC2.40 R20.1 | length 36.3
  Top Layer w0.152: v1(26.416,33.528) 26.543,33.655 R20.1
  sig w0.152: v1(2.892,19.558) 2.892,19.596 2.667,19.821 2.667,22.655 5.373,25.361 5.373,28.614 9.906,33.147 26.035,33.147 v1(26.416,33.528)
  Bottom Layer w0.152: v1(2.892,19.558) 3.65,18.8 IC2.40
LED2: IC2.39 R21.1 | length 35
  Top Layer w0.152: v1(23.241,33.655) R21.1
  sig w0.152: v1(3.429,17.907) 2.286,19.05 2.286,22.831 4.953,25.498 4.953,28.702 9.906,33.655 v1(23.241,33.655)
  Bottom Layer w0.152: v1(3.429,17.907) 3.822,18.3 IC2.39
NetBZ1_2: BZ1.2 D4.2 Q1.3 | length 6.4
  Top Layer w0.254: Q1.3 6.172,20.908 8.909,20.908 D4.2 8.976,18.503 9.426,18.053 BZ1.2
NetC6_2: C6.2 IC1.5 R6.1 | length 4.6
  Top Layer w0.152: C6.2@10.033,26.633 10.159,26.507 R6.1@11.29,26.507 ; R6.1 11.497,26.3 11.543,26.292 ccw(c11.571,26.441) 11.571,26.289 12.51,26.289 cw(c12.51,26.137) 12.618,26.244 12.999,25.863 13.298,25.564 13.426,25.436 cw(c13.319,25.328) 13.471,25.328 13.471,25.186 IC1.5
NetC20_1: C20.1 C21.1 C22.1 IC2.30 | length 4.1
  Bottom Layer w0.254: IC2.30 7.941,13.289 7.941,12.379 8.151,12.169 8.151,11.954 8.294,11.811 C20.1 C21.1 C22.1
NetD1_1: D1.1 R1.2 | length 1.3
  Top Layer w0.152: D1.1 21.512,35.192 R1.2
NetD2_1: D2.1 R20.2 | length 1.6
  Top Layer w0.152: R20.2 27.777,34.974 D2.1
NetD3_1: D3.1 R21.2 | length 1.8
  Top Layer w0.152: R21.2 24.904,35.101 D3.1
NetQ1_1: Q1.1 R3.1 | length 1.3
  Top Layer w0.152: R3.1@3.986,18.669 4.806,18.669 5.08,18.943 Q1.1
NetQ2_1: Q2.1 Q3.3 R5.2 | length 6.5
  Top Layer w0.152: R5.2 11.876,14.986 11.43,14.54 11.43,13.462 12.052,12.84 12.052,12.159 12.41,11.801 Q3.3
NetQ3_1: Q3.1 R2.2 | length 1.6
  Top Layer w0.152: R2.2 15.683,15.24 15.877,15.046 15.877,14.988 15.908,14.957 15.908,14.005 Q3.1
NetR4_2: R4.2 U1.3 | length 1.2
  Top Layer w0.152: R4.2@15.621,17.731 16.77,17.731 U1.3
NetR17_2: R17.2 R18.1 R19.1 | length 2.4
  Top Layer w0.254: R17.2 16.017,22.86 ; R18.1 16.017,22.288 16.017,22.86 ; R19.1 16.017,23.304 16.017,22.86
NRST: C9.2 IC2.7 R7.2 | length 4.5
  Bottom Layer w0.152: IC2.7 16.48,19.726 17.231,19.726 18.542,18.415 C9.2
  Bottom Layer w0.254: C9.2 19.285,18.396 19.285,17.34 R7.2
PF0: C11.2 IC2.5 Y1.3 | length 4.8
  Bottom Layer w0.152: IC2.5 17.498,20.8 17.653,20.955 17.653,21.209 18.107,21.663 18.393,21.663 Y1.3 Y1.3@19.013,22.283
  Bottom Layer w0.508: Y1.3@19.013,22.283 C11.2
PF1: C16.1 IC2.6 Y1.1 | length 7.4
  Bottom Layer w0.152: IC2.6 17.457,20.3 17.653,20.104 17.653,19.812 18.034,19.431 20.048,19.431 ccw(c20.048,19.583) 20.155,19.476 Y1.1 Y1.1@21.67,20.464 ; C16.1@22.666,20.464 C16.1
  Bottom Layer w0.508: Y1.1@21.67,20.464 C16.1@22.666,20.464
SPI_CS1: IC2.59 P9.4 | length 19.1
  gnd w0.152: v1(8.509,8.636) 8.128,9.017 8.128,20.193 v1(10.541,22.606)
  Bottom Layer w0.152: P9.4 8.504,7.705 8.504,8.631 v1(8.509,8.636) ; v1(10.541,22.606) 10.92,22.985 11.428,22.985 11.918,23.475 IC2.59
SPI_CS2: IC2.58 P9.5 | length 19.3
  gnd w0.152: v1(7.493,8.423) 6.985,8.931 6.985,19.727 10.768,23.51 10.821,23.51 10.934,23.622 v1(11.028,23.622)
  Bottom Layer w0.152: v1(7.493,8.423) 7.5,8.416 P9.5 ; v1(11.028,23.622) 11.094,23.689 11.235,23.689 11.418,23.872 IC2.58
SPI_MISO: IC2.56 P9.2 | length 18.7
  gnd w0.152: v1(10.541,8.509) 10.482,8.568 10.482,8.822 9.017,10.287 9.017,19.685 v1(10.541,21.209)
  Bottom Layer w0.152: IC2.56 10.411,24.781 10.411,23.518 10.062,23.169 10.062,21.688 v1(10.541,21.209) ; P9.2 10.5,8.468 v1(10.541,8.509)
SPI_MOSI: IC2.57 RN1.5 | length 2
  Bottom Layer w0.152: RN1.5 10.918,26.7 IC2.57
SPI_MOSI_2: P9.1 R13.2 RN1.4 | length 25.3
  gnd w0.152: v1(11.049,29.21) 11.049,27.305 12.065,26.289 12.065,21.844 9.423,19.202 9.423,11.024 11.783,8.664 v1(11.783,8.608)
  Bottom Layer w0.152: RN1.4 11.049,28.803 v1(11.049,29.21)
  Bottom Layer w0.254: P9.1 11.5,7.861 11.558,8.124 P9.1@11.6,8.314 ; P9.1@11.608,8.379 11.608,8.408 11.783,8.583 v1(11.783,8.608) ; v1@11.811,8.636 11.811,8.703 11.922,8.814 11.922,9.03 R13.2
SPI_SCK: IC2.55 RN1.6 | length 2
  Bottom Layer w0.152: IC2.55 9.985,24.855 9.985,26.699 RN1.6
SPI_SCK_2: P9.3 R15.2 RN1.3 | length 26.2
  gnd w0.152: v1(9.58,8.691) 8.509,9.763 8.509,19.854 11.506,22.851 11.506,25.705 9.809,27.402 v1(9.809,29.234)
  Bottom Layer w0.152: P9.3 9.54,7.74 v1@9.54,8.651 ; v1(9.809,29.234) 9.809,29.139 9.878,29.071 9.878,28.78 RN1.3
  Bottom Layer w0.254: P9.3 9.525,7.725 9.525,8.636 9.54,8.651 v1(9.58,8.691) 9.636,8.747 9.636,9.03 R15.2
SWD_CLK: IC2.49 P2.2 | length 24.1
  Top Layer w0.152: v1@13.462,6.223 v1(13.481,6.204) 13.5,6.185 P2.2
  sig w0.152: v1(7.464,17.907) 6.858,17.301 6.858,12.879 9.603,10.135 11.364,10.135 13.481,8.017 v1(13.481,6.204)
  Bottom Layer w0.152: IC2.49 6.918,20.936 7.207,20.647 7.207,18.257 7.464,18.001 v1(7.464,17.907)
SWD_IO: IC2.46 P2.1 | length 21.7
  Top Layer w0.152: v1(12.446,6.223) 12.5,6.169 P2.1
  sig w0.152: v1(6.448,18.009) 6.477,17.98 6.477,12.829 9.527,9.779 11.288,9.779 12.446,8.621 v1(12.446,6.223)
  Bottom Layer w0.152: IC2.46 5.004,21.726 5.697,21.726 6.829,20.595 6.829,18.39 v1(6.448,18.009)
UART1_RX: IC2.43 P2.6 | length 23.8
  Top Layer w0.152: P2.6 17.636,5.136 17.636,6.079 v1(17.653,6.096)
  sig w0.152: v1(6.35,19.939) 8.382,17.907 8.382,11.786 9.729,10.439 11.49,10.439 16.341,5.588 17.145,5.588 v1(17.653,6.096)
  Bottom Layer w0.152: IC2.43 IC2.43 5.99,20.299 v1(6.35,19.939)
UART1_TX: IC2.42 RN1.8 | length 10.1
  sig w0.152: v1(3.79,20.193) 3.79,22.586 v1(7.747,26.543)
  Bottom Layer w0.152: v1(3.79,20.193) 3.829,20.193 4.148,19.874 4.856,19.874 IC2.42 ; v1(7.747,26.543) 8.229,26.543 RN1.8
UART1_TX_2: P2.5 R8.2 RN1.1 | length 29.8
  Top Layer w0.152: P2.5 16.505,5.005 16.505,6.55 R8.2
  sig w0.152: v1(8.382,29.21) 8.763,28.829 8.763,11.836 9.855,10.744 11.862,10.744 v1(16.51,6.096)
  Bottom Layer w0.152: v1(8.382,29.21) 8.382,28.676 RN1.1
UART2_RX: IC2.17 P1.2 | length 25.9
  Top Layer w0.152: v1(17.145,31.496) 17.25,31.601 17.25,33.15 P1.2@17.25,36.9
  sig w0.152: v1(15.113,14.351) 15.719,14.957 15.719,17.301 14.478,18.542 14.478,21.971 17.145,24.638 v1(17.145,31.496)
  Bottom Layer w0.152: IC2.17 14.418,13.87 14.492,13.943 14.492,13.973 14.803,14.284 15.046,14.284 v1(15.113,14.351)
UART3_RX: IC2.52 P8.1 | length 12.3
  Top Layer w0.254: P8.1@3.1,16.75 P8.1@6.85,16.75
  Bottom Layer w0.152: v1(7.62,16.891) 8.001,17.272 8.001,18.796 7.62,19.177 7.62,22.479 8.382,23.241 8.382,24.752 IC2.52
UART3_TX: IC2.51 RN1.7 | length 3.1
  Bottom Layer w0.152: IC2.51 7.918,25.698 8.128,25.908 9.017,25.908 9.252,26.143 RN1.7
UART3_TX_2: P8.2 R11.2 RN1.2 | length 21.4
  Top Layer w0.152: P8.2@3.1,15.25 6.85,15.25 6.982,15.118 9.725,15.118 R11.2 9.906,15.035 v1(9.906,15.748)
  sig w0.152: v1(9.144,29.21) 9.144,16.51 v1(9.906,15.748)
USB_D+: P7.7 P8.5 | length 16.5
  Top Layer w0.254: P8.5@3.1,10.75 6.85,10.75 8.808,10.75 9.611,9.947 16.596,9.947 v1(17.399,9.144)
  Bottom Layer w0.254: v1(17.399,9.144) 17.446,9.097 17.446,7.754 P7.7
USB_D-: P7.8 P8.6 | length 14.6
  Top Layer w0.254: P8.6@3.1,9.25 6.85,9.25 15.896,9.25 v1(16.256,8.89)
  Bottom Layer w0.254: v1(16.256,8.89) 16.256,8.823 16.377,8.702 16.377,7.823 P7.8
pads on no net: IC2.2 IC2.3 IC2.4 IC2.10 IC2.11 IC2.14 IC2.15 IC2.16 IC2.20 IC2.21 IC2.22 IC2.23 IC2.24 IC2.29 IC2.37 IC2.38 IC2.44 IC2.45 IC2.50 IC2.54 IC2.61 IC2.62 U1.4

## Polygon pours and split planes (outlines as drawn)
GND on Top Layer "NONET_L04_P-001" (hatched Horizontal grid 0 track 0.254, remove dead copper, pour order 14): 0,39.878 0.381,40.259 30.48,40.259 30.48,0.635 29.845,0 0,0
5V on Top Layer "5V_L01_P002" (hatched Horizontal grid 0 track 0.254, remove dead copper, pour order 2): 19.685,27.305 20.955,27.305 20.955,26.289 19.812,25.146 19.812,23.368 19.05,23.368 18.542,22.86 18.542,22.098 19.304,21.336 19.304,17.653 18.923,17.272 18.542,17.272 18.542,19.558 17.907,20.193 17.907,23.241 18.542,23.876 18.542,25.019
12V on Top Layer "12V_L01_P000" (hatched Horizontal grid 0 track 0.254, remove dead copper, pour order 0): 11.049,38.735 12.954,38.735 12.954,31.75 12.639,31.435 12.639,27.562 11.938,27.562 11.938,29.21 11.049,30.099
DCDC_SW on Top Layer "DCDC_SW_L01_P001" (hatched Horizontal grid 0 track 0.254, remove dead copper, pour order 1): 13.462,26.543 17.399,26.543 17.399,26.162 17.399,24.511 16.891,24.511 16.891,25.146 16.129,25.908 13.97,25.908 13.843,25.908 13.462,26.289
GND on Bottom Layer "NONET_L04_P-001" (hatched Horizontal grid 0 track 0.254, remove dead copper, pour order 11): 0,40.005 0.254,40.259 30.607,40.259 30.607,0.254 30.353,0 0,0
12V on Bottom Layer "12V_L04_P003" (hatched Horizontal grid 0 track 0.254, remove dead copper, pour order 3): 21.463,7.708 21.463,9.271 cw(c22.098,9.271) 22.098,9.906 23.241,9.906 cw(c23.241,9.398) 23.749,9.398 23.749,7.62
GND on gnd "NONET_L04_P-001" (hatched Horizontal grid 0 track 0.254, remove dead copper, pour order 13): 0,40.132 30.226,40.132 30.226,1.524 28.702,0 0,0
12V on gnd "NONET_L04_P-001" (hatched Horizontal grid 0 track 0.254, remove dead copper, pour order 6): 10.795,36.068 12.065,36.068 12.446,35.687 12.446,33.782 11.938,33.274 10.922,33.274 10.414,33.782 10.414,35.687
12V on gnd "12V_L02_P005" (hatched Horizontal grid 0 track 0.254, remove dead copper, pour order 5): 22.098,10.287 23.368,10.287 cw(c23.368,9.779) 23.876,9.779 23.876,8.89 cw(c23.368,8.89) 23.368,8.382 22.098,8.382 cw(c22.098,8.89) 21.59,8.89 21.59,9.779 cw(c22.098,9.779)
GND on sig "NONET_L04_P-001" (hatched Horizontal grid 0 track 0.254, remove dead copper, pour order 12): 0.044,40.132 0.298,39.878 30.778,39.878 30.778,0.381 30.397,0 0.044,0

## Keep-outs
Keep-Out Layer:
  the board outline again, w0.254

## Other copper
Top Layer:
  pour cut-out: 0,19.05 5.715,19.05 7.366,18.997 7.366,19.304 7.112,19.558 6.35,19.558 5.715,20.193 5.715,26.924 12.7,26.924 16.51,23.114 16.51,21.99 16.51,17.127 15.768,16.419 14.218,16.492 13.843,16.135 13.843,13.335 14.605,13.335 14.605,16.002 17.272,16.002 17.272,12.192 16.002,10.922 9.79,10.922 9.388,11.292 7.858,12.7 0,12.7
  pour cut-out: 0,11.811 7.754,11.811 8.54,11.093 8.717,9.144 13.081,9.144 13.081,8.89 12.065,7.874 0.127,7.874 0,8.001
  pour cut-out: 6.339,40.513 20.193,40.513 20.193,39.37 20.193,30.48 16.383,30.48 16.383,38.1 10.594,38.1 10.83,27.813 9.275,27.813 6.501,30.543
  pour cut-out: 16.002,24.13 17.653,24.13 17.653,22.606 16.129,22.606
  pour cut-out: 16.129,30.48 31.115,30.48 31.115,25.019 20.13,25.019 22.669,27.559 15.748,27.559 15.748,26.924 15.367,26.924 15.367,29.718
gnd:
  pour cut-out: 4.47,39.878 6.35,39.878 6.35,27.432 4.956,27.432 4.594,27.789
Bottom Layer:
  pour cut-out: 0,30.353 12.446,30.353 12.446,33.147 13.208,33.147 13.208,29.972 13.208,26.67 9.017,22.479 1.708,22.479 1.5,17.78 0,17.78 0,28.5

## Silkscreen, mask and mechanical layers (free items; w line width, h text height)
Top Overlay:
  text "背带" at 6.605,36.46 h1.52
  text "LED2" at 24.638,34.29 h1 r270
  text "LED1" at 27.813,34.29 h1 r270
  text "电源" at 21.199,33.02 h1.52 r270
  text "5V" at 6.604,26.808 h1
  text "GND" at 6.604,25.919 h1
  text "EX_IO_1" at 6.731,25.07 h1
  text "EX_IO_2" at 6.731,24.054 h1
  text "EX_IO_3" at 6.731,23.038 h1
  text "EX_IO_4" at 6.731,22.022 h1
  text "UART1_TX" at 16.607,8.13 h2 r90
  text "CAMERA" at 1.397,6.621 h1.52
  text "SWD_IO" at 12.797,6.098 h2 r90
  text "SWD_CLK" at 13.686,6.098 h2 r90
  text "5V_OUT" at 14.702,6.096 h2 r90
  text "SWD_IO" at 15.591,6.098 h2 r90
  text "UART1_RX" at 17.75,6.098 h2 r90
Bottom Overlay:
  text "肌电1" at 6.985,37.207 h1.52
  text "肌电2" at 26.162,37.207 h1.52
  text "手部信号" at 2.17,6.097 h1.52 r270
  text "手部供电" at 27.322,6.097 h1.52 r270
Drill Drawing:
  circle w0.254: c37.227,10.816 r0.847
  lines w0.254: 36.38,6.159 38.074,6.159 38.074,7.853 36.38,7.853 36.38,6.159 ; 36.38,15.473 38.074,15.473 37.227,13.779 36.38,15.473
  lines w0.381: 34.861,5.016 304.636,5.016 ; 34.861,16.447 304.636,16.447 ; 48.854,1.206 48.854,20.256 ; 63.836,1.206 63.836,20.256 ; 91.514,1.206 91.514,20.256 ; 104.363,1.206 104.363,20.256 ; 123.002,1.206 123.002,20.256 ; 161.09,1.206 161.09,20.256 ; 176.072,1.206 176.072,20.256 ; 195.016,1.206 195.016,20.256 ; 214.06,1.206 214.06,20.256 ; 235.746,1.206 235.746,20.256 ; 269.62,1.206 269.62,20.256 ; 34.861,1.206 304.636,1.206 304.636,20.256 34.861,20.256 34.861,1.206
  text "Symbol" at 37.148,17.59 h1.83
  text "Count" at 49.997,17.59 h1.83
  text "Hole Size" at 64.979,17.59 h1.83
  text "Plated" at 92.657,17.59 h1.83
  text "Hole Type" at 105.506,17.59 h1.83
  text "Drill Layer Pair" at 124.145,17.59 h1.83
  text "Via/Pad" at 162.233,17.59 h1.83
  text "Pad Shape" at 177.215,17.59 h1.83
  text "Template" at 196.159,17.59 h1.83
  text "Description" at 215.203,17.59 h1.83
  text "Hole Tolerance (+)" at 236.889,17.59 h1.83
  text "Hole Tolerance (-)" at 270.763,17.59 h1.83
  text "2" at 49.997,13.779 h1.52
  text "0.500mm (19.69mil)" at 64.979,13.779 h1.52
  text "PTH" at 92.657,13.779 h1.52
  text "Round" at 105.506,13.779 h1.52
  text "Top Layer - Bottom Layer" at 124.145,13.779 h1.52
  text "Via" at 162.233,13.779 h1.52
  text "Rounded" at 177.215,13.779 h1.52
  text "v70h50m0mx0" at 196.159,13.779 h1.52
  text "4" at 49.997,9.97 h1.52
  text "1.600mm (62.99mil)" at 64.979,9.97 h1.52
  text "PTH" at 92.657,9.97 h1.52
  text "Round" at 105.506,9.97 h1.52
  text "Top Layer - Bottom Layer" at 124.145,9.97 h1.52
  text "Via" at 162.233,9.97 h1.52
  text "Rounded" at 177.215,9.97 h1.52
  text "(Mixed)" at 196.159,9.97 h1.52
  text "136" at 49.997,6.159 h1.52
  text "0.300mm (11.81mil)" at 64.979,6.159 h1.52
  text "PTH" at 92.657,6.159 h1.52
  text "Round" at 105.506,6.159 h1.52
  text "Top Layer - Bottom Layer" at 124.145,6.159 h1.52
  text "Via" at 162.233,6.159 h1.52
  text "Rounded" at 177.215,6.159 h1.52
  text "v50h30m0mx0" at 196.159,6.159 h1.52
  text "142 Total" at 49.997,2.349 h1.52